# Altium PCB AMPURR.PcbDoc (part 3 of 6)
Units mm, origin at the board's own origin, x right, y up, seen from the top; angles counter-clockwise.
Board outline 100 x 100 mm, 4 copper layers (Top Layer, GND, VDD, Bottom Layer), stack 1.586 mm thick; 522 components, 281 nets, 1527 pads, 2431 vias.
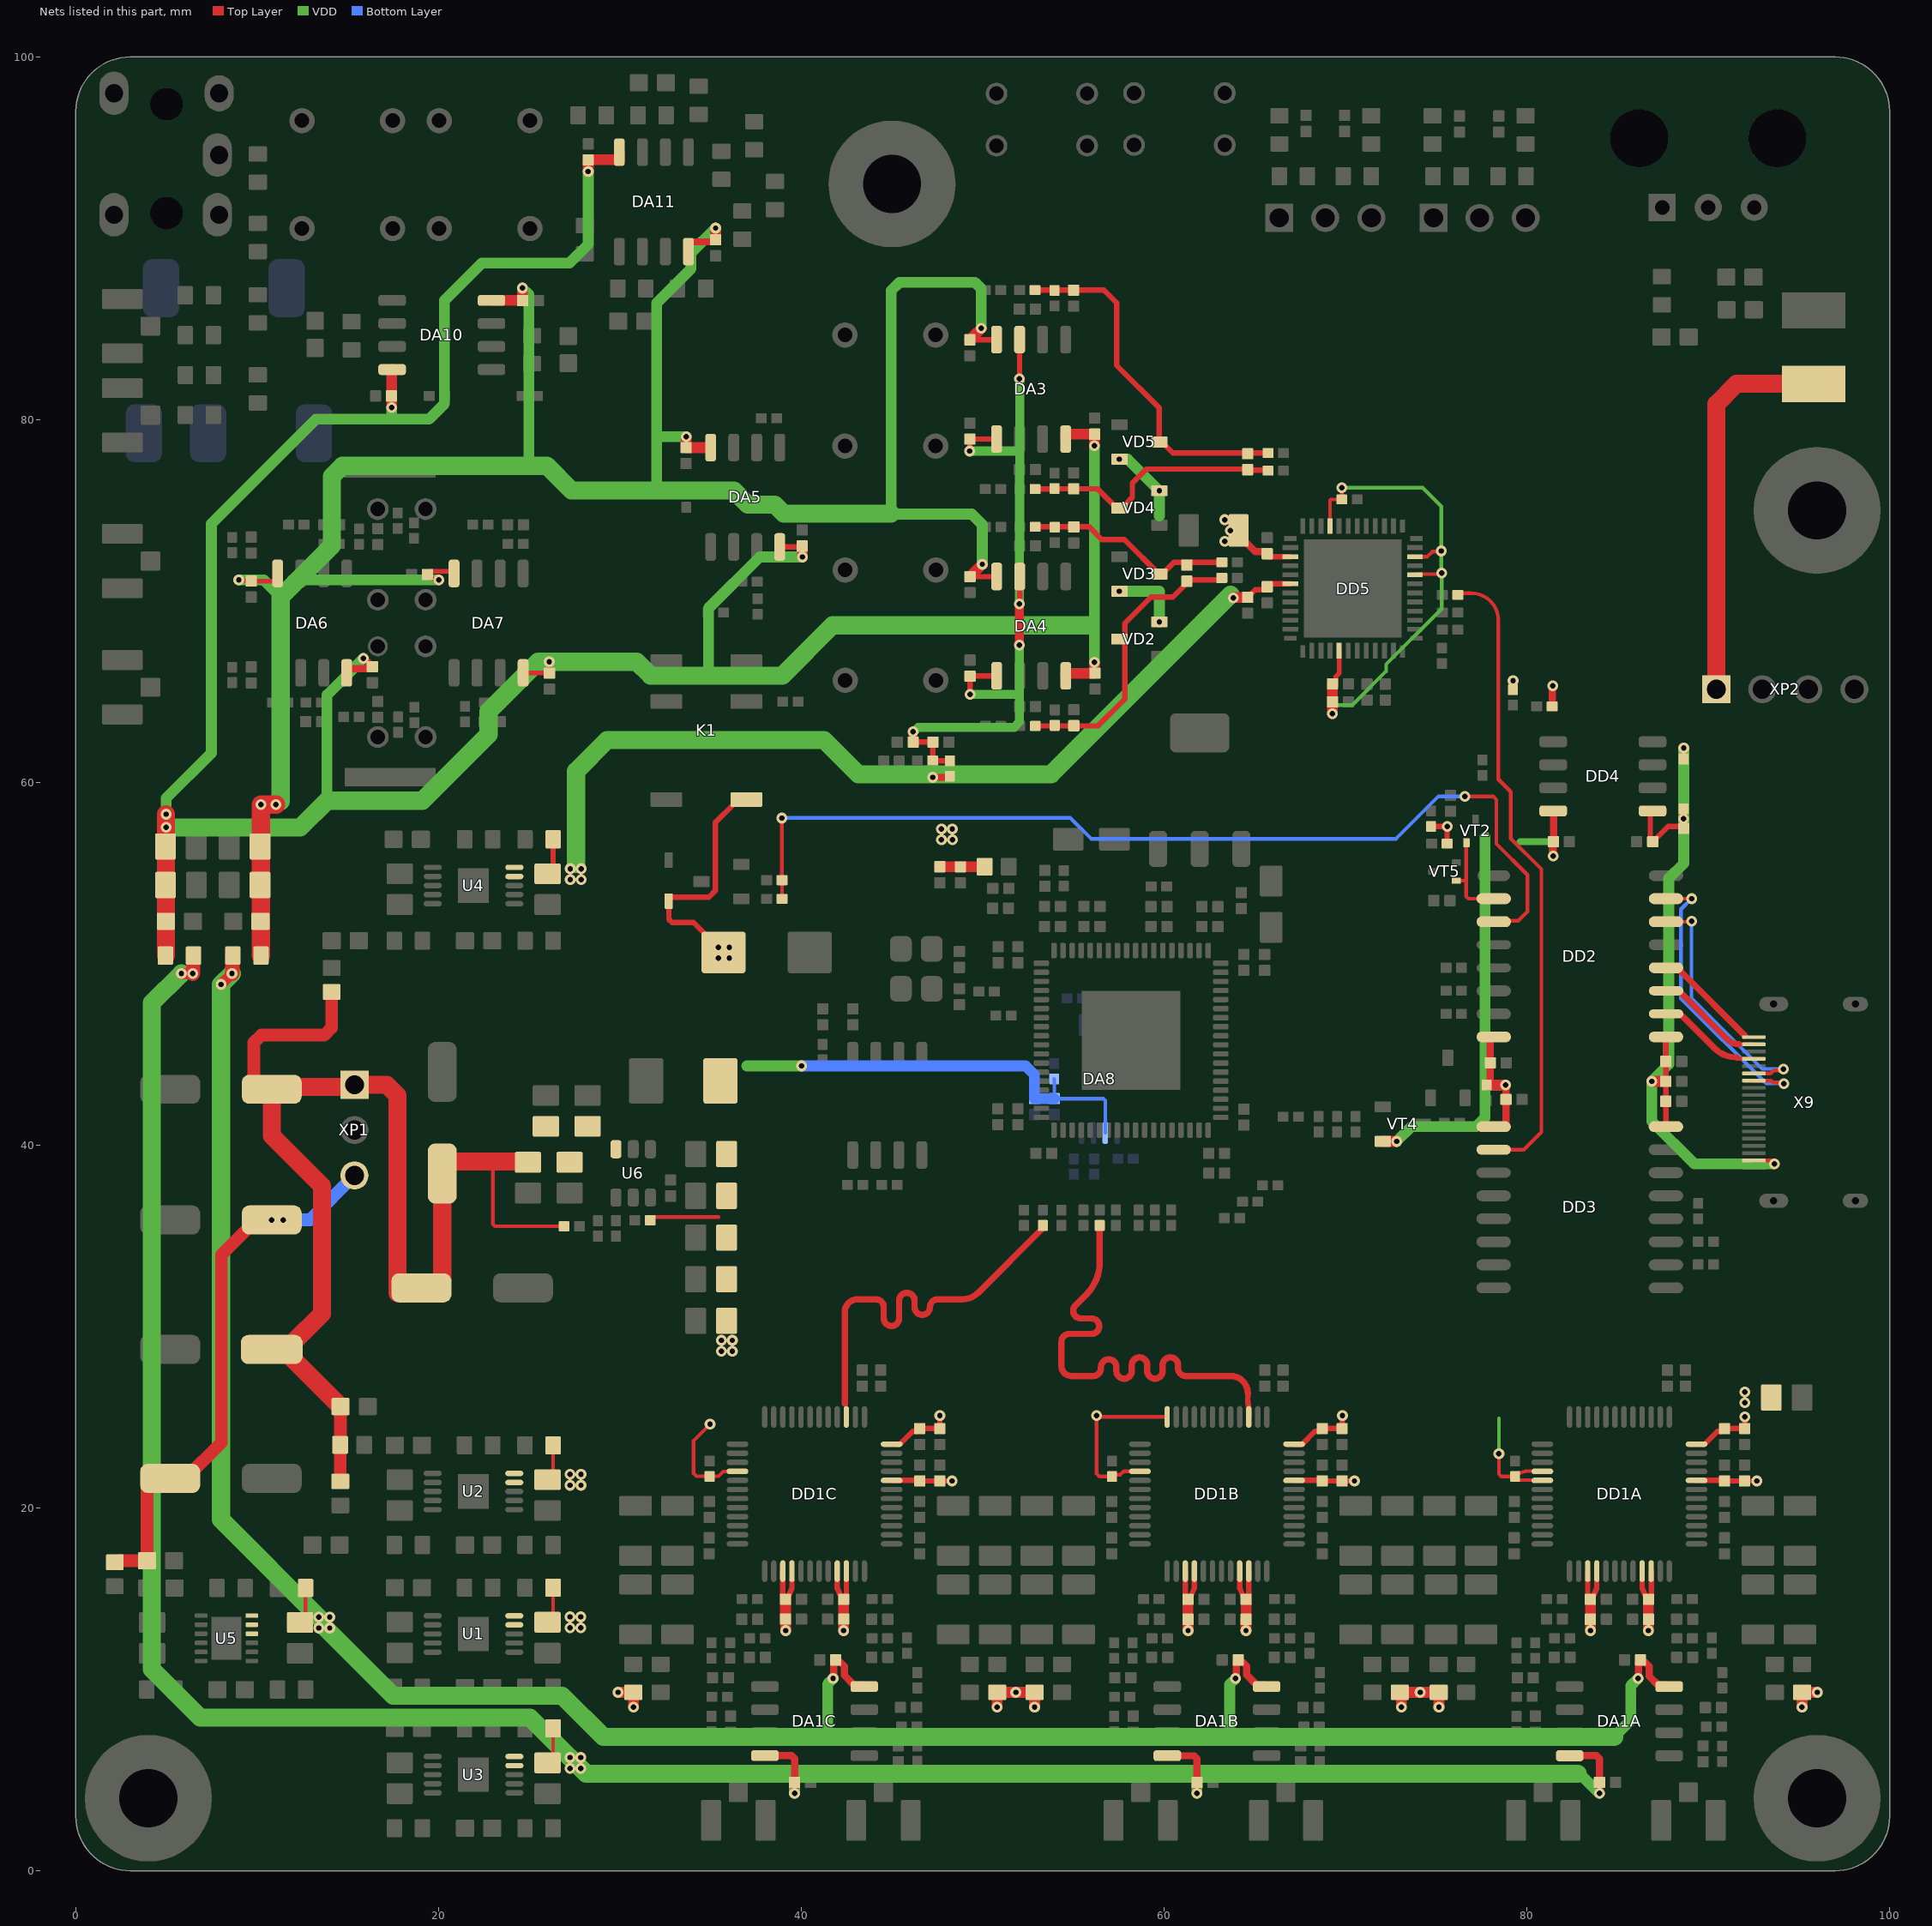
[diagram p4: the nets of this part, all layers, seen from the top]

## Via types
v1: diameter 0.6, hole 0.3, Top Layer to Bottom Layer, tented both sides, 2431 vias

## Nets (pads, with @x,y where several pads share a name; then routed paths per layer and width w, separated by ;. In a path a pad name is that pad's centre, name@x,y a point inside that pad or via, vN(x,y) a via of type N, cw(c..) or ccw(c..) an arc to the next point about the centre after c; other vN are vias at no path point) (continued)
+3.3VD: (continued)
  Top Layer w0.3: VD1.CA@32.693,53.462 32.693,52.458 32.868,52.283 34.058,52.283 34.647,51.694 34.647,51.63 35.363,50.914 v1(35.427,50.914) ; VD1.CA@32.693,53.598 32.768,53.673 34.897,53.673 35.267,54.043 35.267,57.801 36.249,58.783 36.249,58.814 36.499,59.064 K1.1@36.974,59.064 ; C75.1@35.273,50.331 C75.1@35.273,50.882 ; C75.1@35.389,50.876 35.633,50.632 C75.1@35.708,50.632 ; DD1C.48@45.321,23.517 45.427,23.517 46.132,24.221 46.37,24.221 C10C.1@46.53,24.381 C9C.1@47.637,24.381 ; v1(47.636,25.089) 47.636,24.541 C9C.1@47.649,24.521 ; DD1B.48@67.168,23.519 67.618,23.519 67.618,23.521 68.318,24.221 68.558,24.221 C10B.1@68.718,24.381 C9B.1@69.818,24.381 69.818,24.541 v1(69.832,25.089) ; R25.2@74.724,57.575 74.727,57.572 75.604,57.572 v1(75.607,57.57) 75.605,57.568 75.605,56.627 R129.2@75.603,56.625 ; DD1A.48@89.697,23.517 89.797,23.517 90.502,24.221 90.746,24.221 C10A.1@90.906,24.381 C9A.1@92.006,24.382 ; C9A.1@92.006,24.382 92.018,24.382 v1(92.018,25.026) v1@92.018,25.066
  Top Layer w0.4: R128.2@77.786,43.32 77.786,43.345 77.986,43.546 C39.2@77.986,44.545 77.986,45.88 78.079,45.972 DD2.16@78.175,45.972 ; DD3.1@78.171,41.024 78.761,41.024 78.853,41.117 C41.2@78.853,42.525 78.844,42.534 78.844,43.312 v1(78.834,43.321) ; R106.1@79.235,65.114 79.239,65.118 79.239,65.617 v1(79.244,65.621) ; R105.1@81.394,64.2 81.409,64.215 81.409,65.314 v1(81.424,65.329) ; v1(81.45,55.945) 81.458,55.953 81.458,56.73 C44.2@81.466,56.737 81.466,58.421 DD4.8@81.455,58.432
  Top Layer w0.6: v1@36.194,29.239 v1(36.194,29.247) ; C146.2@47.64,55.354 48.768,55.354 48.77,55.352 49.969,55.352 FB4.1@49.984,55.336 ; v1(69.284,63.8) 69.284,65.436 C116.2@69.287,65.439 ; VT4.2@72.057,40.217 v1(72.82,40.216) ; R128.2@77.908,43.32 78.833,43.32 v1(78.834,43.321)
  Top Layer w1: XP2.1@90.441,65.14 90.441,80.859 91.56,81.978 L1.2@95.812,81.978
  VDD w0.2: 69.38,64.267 70.375,64.267 72.245,66.138 72.245,66.516 75.304,69.575 v1(75.304,71.548) 75.285,71.548 v1(75.285,72.762) 75.285,75.227 74.258,76.254 v1(69.805,76.254) ; v1(78.459,22.988) 78.458,22.989 78.458,24.941
  VDD w0.4: 79.626,56.738 81.201,56.738 81.436,56.503 v1@81.436,55.96
  VDD w0.6: 36.998,44.372 v1(40.016,44.372) ; v1(72.82,40.216) 73.632,41.028 77.206,41.028 77.688,41.51 77.688,57.007 ; 77.795,43.32 78.833,43.32 v1(78.834,43.321)
  Bottom Layer w0.2: R99.2@53.941,43.655 53.948,43.648 53.948,42.579 C141.2@53.955,42.57 ; C141.2@53.955,42.57 56.639,42.57 56.756,42.453 DA8.6@56.756,40.682
  Bottom Layer w0.6: v1(40.016,44.372) 52.364,44.372 52.855,43.881 C140.2@52.855,42.57 C141.2@53.955,42.57
  other v1: 92.019,25.798 92.019,26.398 35.594,28.647 36.194,28.647 35.594,29.247 35.427,50.314 36.027,50.314 36.027,50.914 47.727,56.844 48.326,56.844 47.727,57.442 48.325,57.442
+5VA: C17A.1 C17B.1 C17C.1 C18A.1 C18B.1 C18C.1 C19A.2 C19B.2 C19C.2 C20A.2 C20B.2 C20C.2 C49.1 DD1A.27 DD1A.28 DD1A.33 DD1A.34 DD1B.27 DD1B.28 DD1B.33 DD1B.34 DD1C.27 DD1C.28 DD1C.33 DD1C.34 R1A.2 R1B.2 R1C.2 R17A.2 R17B.2 R17C.2 R32.2 U1.9 U1.10 | length 50.4
  Top Layer w0.2: C49.1@26.313,14.01 R32.2@26.313,15.602
  Top Layer w0.3: C49.1@26.005,13.702 ccw(c26.005,14.01) C49.1@26.313,14.01 ; DD1C.27@38.98,16.519 38.98,15.12 C17C.1@39.13,14.969 C17C.1@39.29,15.129 ; C17C.1@39.288,15.125 39.478,15.574 DD1C.28@39.48,16.069 ; DD1C.33@41.98,16.069 41.982,15.574 C19C.2@42.172,15.125 ; C19C.2@42.172,15.129 C19C.2@42.332,14.969 42.48,15.117 DD1C.34@42.48,16.519 ; DD1B.27@61.168,16.515 61.168,15.115 61.318,14.965 C17B.1@61.478,15.125 ; DD1B.27@61.168,16.519 61.168,15.12 C17B.1@61.318,14.969 ; C18B.1@61.318,13.869 C17B.1@61.318,14.969 ; C17B.1@61.476,15.125 61.666,15.574 DD1B.28@61.668,16.069 ; C17B.1@61.478,15.129 C17B.1@61.318,14.969 ; DD1B.33@64.168,16.069 64.17,15.574 64.36,15.125 64.52,14.965 64.671,15.115 DD1B.34@64.671,16.515 ; C20B.2@64.52,13.869 C19B.2@64.52,14.969 ; C19B.2@64.668,14.969 DD1B.34@64.668,16.519 ; DD1A.27@83.356,16.515 83.356,15.116 C17A.1@83.506,14.965 C17A.1@83.666,15.125 ; DD1A.27@83.356,16.519 83.356,15.12 C17A.1@83.506,14.969 ; C18A.1@83.506,13.869 C17A.1@83.506,14.969 ; C17A.1@83.664,15.125 83.854,15.574 DD1A.28@83.856,16.069 ; C17A.1@83.666,15.129 C17A.1@83.506,14.969 ; DD1A.33@86.356,16.519 86.356,16.069 86.358,15.574 86.548,15.125 C19A.2@86.708,14.965 ; C19A.2@86.856,14.969 DD1A.34@86.856,16.519 ; C19A.2@86.858,15.116 DD1A.34@86.858,16.515
  Top Layer w0.6: v1(29.895,9.833) R17C.2@30.735,9.833 30.745,9.823 v1(30.745,9.02) ; C17C.1@39.13,14.969 C18C.1@39.13,13.869 39.135,13.864 v1(39.135,13.241) ; v1(42.327,13.241) 42.327,13.864 C20C.2@42.332,13.869 C19C.2@42.332,14.969 ; v1(50.796,9.02) 50.796,9.823 R1C.2@50.806,9.833 52.85,9.833 52.864,9.819 v1(52.864,9.016) ; C17B.1@61.318,14.965 C18B.1@61.318,13.865 61.323,13.86 v1(61.323,13.236) ; v1(64.515,13.236) 64.515,13.86 C20B.2@64.52,13.865 C19B.2@64.52,14.965 ; v1(73.088,9.02) 73.088,9.823 73.098,9.833 R17A.2@75.142,9.833 75.156,9.819 v1(75.156,9.016) ; C17A.1@83.506,14.965 C18A.1@83.506,13.865 83.511,13.86 v1(83.511,13.237) ; v1(86.703,13.237) 86.703,13.86 C20A.2@86.708,13.865 C19A.2@86.708,14.965 ; v1(95.172,9.02) 95.172,9.823 R1A.2@95.182,9.833 v1(96.022,9.833)
  other v1: 51.825,9.833 74.117,9.833 27.239,13.399 27.839,13.399 27.239,13.999 27.839,13.999
+5VAK: C60.1 C104.1 C105.2 C109.2 C110.2 DD5.3 DD5.6 R41.2 R59.1 U4.9 U4.10 VD2.2 VD3.2 VD4.2 VD5.2 | length 64.2
  Top Layer w0.3: C60.1@26.007,54.967 26.315,55.275 R41.2@26.315,56.867 ; C109.2@64.764,70.368 65.028,70.632 65.523,70.632 C110.2@65.683,70.792 ; C104.1@65.667,72.45 66.439,72.45 DD5.3@66.963,72.45 ; C110.2@65.915,70.951 DD5.6@66.963,70.951
  Top Layer w0.4: v1(47.24,60.283) 48.188,60.283 R59.1@48.188,60.344 ; C105.2@64.19,73.566 65.033,72.724 65.672,72.724 65.733,72.663 C104.1@65.763,72.633
  Top Layer w0.6: v1(63.812,70.178) 63.833,70.199 64.595,70.199 C109.2@64.605,70.209
  VDD w0.6: v1(57.537,70.542) 59.737,70.542 v1(59.737,68.858) ; v1(57.537,77.822) 57.993,77.822 v1@59.735,76.08 ; 59.737,74.694 v1(59.737,76.082)
  VDD w1: 27.577,55.522 27.577,60.623 29.295,62.342 41.253,62.342 43.139,60.456 53.768,60.456 v1@63.66,70.349
  other v1: 27.255,54.644 27.855,54.644 27.255,55.244 27.855,55.244 63.346,73.303 63.654,73.895 63.346,74.487
+12VOP: C31A.2 C31B.2 C31C.2 C59.1 DA1A.8 DA1B.8 DA1C.8 R40.1 R57.1 U3.9 U3.10 | length 138.4
  Top Layer w0.2: C59.1@26.007,5.945 ccw(c26.007,6.253) 26.315,6.253 R40.1@26.315,7.845
  Top Layer w0.4: DA1C.8@38.063,6.342 39.468,6.342 39.63,6.18 39.63,4.872 39.626,4.868 v1(39.626,4.274) ; DA1B.8@60.251,6.338 61.656,6.338 61.818,6.176 C31B.2@61.818,4.868 61.813,4.863 v1(61.813,4.269) ; DA1A.8@82.439,6.338 83.844,6.338 84.006,6.176 C31A.2@84.006,4.868 ; v1(84.001,4.269) 84.001,4.863 C31A.2@84.006,4.868
  Top Layer w0.6: v1@5.819,49.458 6.437,49.458 v1(6.444,49.465)
  Top Layer w0.8: v1(6.444,49.465) 6.469,49.49 6.469,50.444 R57.1@6.484,50.459
  VDD w0.6: v1@5.825,49.465 v1(6.444,49.465) ; v1(39.626,4.274) 39.626,5.151 ; v1(61.813,4.269) 61.813,5.151 ; 82.868,5.403 v1(84.001,4.269)
  VDD w1: v1@5.812,49.465 4.19,47.843 4.19,11.11 5.443,9.857 6.858,8.442 25.042,8.442 v1(27.243,6.241) 27.543,5.941 v1(27.843,5.641) 28.134,5.35 56.906,5.35 56.911,5.346 82.81,5.346
  other v1: 27.243,5.641 27.843,6.241 5.819,49.465
+12VOPF: C84.1 C85.1 C86.2 C87.2 C88.2 C89.1 C164.1 C165.1 C170.1 C171.1 DA3.8 DA4.8 DA5.8 DA6.8 DA7.8 DA10.8 DA11.8 R57.2 | length 164
  Top Layer w0.25: DA7.8@24.662,66.046 24.668,66.04 26.111,66.04 26.107,66.044 v1@26.107,66.648
  Top Layer w0.3: DA5.8@38.809,72.987 38.82,72.997 C87.2@40.046,72.997
  Top Layer w0.4: DA6.8@14.937,66.046 15.037,66.267 16.241,66.267 C165.1@16.351,66.377 15.887,66.841 v1(15.859,66.841)
  Top Layer w0.6: v1(17.408,80.666) 17.408,82.768 DA10.8@17.435,82.768 ; v1(28.247,93.684) 28.247,94.328 C170.1@28.244,94.331 29.964,94.331 DA11.8@29.964,94.751 ; v1(40.055,72.435) C87.2@40.055,73.03 ; DA3.8@54.573,78.938 54.573,79.206 C88.2@56.134,79.206 ; DA4.8@54.581,65.878 54.581,66.021 C86.2@56.183,66.021 ; C86.2@56.164,66.051 v1@56.164,66.623 ; v1(56.163,78.563) C88.2@56.163,79.194
  Top Layer w1: C85.1@4.939,56.472 C85.1@4.971,56.472 ; R57.2@4.971,50.459 C85.1@4.971,56.472 ; v1(4.971,58.247) C85.1@4.971,56.472
  VDD w0.6: v1(4.971,57.523) 4.971,59.124 7.467,61.621 7.467,74.266 13.237,80.035 17.338,80.035 ; 13.848,58.994 13.848,64.83 v1(15.859,66.841) ; v1(17.408,80.666) 17.408,80.106 17.338,80.035 ; v1(28.247,93.684) 28.247,89.676 27.213,88.642 22.387,88.642 20.317,86.572 20.317,80.879 19.474,80.035 17.338,80.035 ; 34.884,65.944 34.884,69.611 37.708,72.435 v1(40.055,72.435) ; v1@56.163,66.638 v1(56.163,78.563)
  VDD w1: v1(4.971,57.523) 4.976,57.519 12.373,57.519 13.848,58.994 ; 14.046,58.994 19.094,58.994 22.753,62.652 22.753,63.927 25.479,66.653 v1(26.102,66.653) 30.927,66.653 31.693,65.887 38.948,65.887 41.728,68.667 55.953,68.667
  other v1: 56.163,66.624
-12V0: C65.1 C66.2 C191.2 FB3.1 XP1.3 | length 30.5
  Top Layer w0.7: FB3.1@2.145,16.92 2.2,16.92 2.376,17.096 C65.1@3.92,17.096 3.92,21.175 4.377,21.632 C191.2@5.2,21.632 6.05,21.632 8.025,23.607 8.025,33.955 9.95,35.88 v1(10.8,35.88) C66.2@11.219,36.299
  Bottom Layer w0.7: v1(11.43,35.88) 12.908,35.88 XP1.3@15.363,38.335
-12VOP: C32A.1 C32B.1 C32C.1 C69.2 DA1A.4 DA1B.4 DA1C.4 R51.2 R64.2 U5.10 U5.11 U5.12 | length 136.8
  Top Layer w0.2: C69.2@12.358,13.689 ccw(c12.358,13.997) 12.666,13.997 R51.2@12.666,15.59
  Top Layer w0.4: v1@41.753,10.693 41.791,10.731 41.791,11.537 C32C.1@41.876,11.622 ; C32C.1@41.895,11.622 42.005,11.512 42.132,11.512 42.367,11.278 42.367,10.775 42.889,10.252 43.37,10.252 DA1C.4@43.47,10.152 ; v1@63.94,10.693 63.94,10.747 63.979,10.787 63.979,11.518 C32B.1@64.083,11.622 ; C32B.1@64.083,11.618 64.189,11.512 64.32,11.512 64.554,11.278 64.554,10.793 65.096,10.252 65.553,10.252 DA1B.4@65.657,10.148 ; v1@86.128,10.693 86.166,10.731 86.166,11.532 C32A.1@86.252,11.618 ; C32A.1@86.271,11.618 86.377,11.512 86.508,11.512 86.742,11.278 86.742,10.727 87.221,10.248 87.745,10.248 DA1A.4@87.845,10.148
  Top Layer w0.6: v1(8.004,48.862) v1(8.607,49.465)
  Top Layer w0.8: v1(8.607,49.465) 8.635,49.492 8.635,50.44 R64.2@8.653,50.459
  VDD w0.6: 41.452,7.374 41.452,10.299 v1(41.753,10.6) ; 63.62,7.254 63.62,7.374 63.62,10.28 v1(63.94,10.6) ; 84.81,7.374 85.732,8.296 85.732,10.204 v1(86.128,10.6)
  VDD w1: v1(8.607,49.465) v1(8.004,48.862) 8.004,19.357 v1@13.527,13.834 ; v1@13.611,13.508 13.64,13.508 17.493,9.654 26.812,9.654 29.091,7.374 41.452,7.374 63.62,7.374 84.81,7.374
  other v1: 13.393,13.382 13.993,13.382 13.393,13.982 13.993,13.982
-12VOPF: C91.2 C92.1 C95.2 C96.1 C97.2 C98.1 C166.2 C167.2 C172.2 C173.2 DA3.4 DA4.4 DA5.4 DA6.4 DA7.4 DA10.4 DA11.4 R64.1 | length 142.7
  Top Layer w0.25: v1(8.984,71.163) 9.014,71.132 9.637,71.132 C167.2@9.668,71.102 10.954,71.102 11.127,71.275 DA6.4@11.127,71.526 ; v1@19.991,71.106 19.567,71.284 C166.2@19.382,71.469 19.554,71.641 20.737,71.641 DA7.4@20.852,71.526
  Top Layer w0.3: C96.1@49.293,84.406 50.751,84.406 DA3.4@50.763,84.418 ; C92.1@49.3,71.346 50.758,71.346 DA4.4@50.77,71.358
  Top Layer w0.4: DA11.4@33.774,89.271 33.774,89.709 33.874,89.809 C172.2@35.159,89.809
  Top Layer w0.6: DA10.4@22.915,86.578 C173.2@24.629,86.578 ; v1(24.619,87.261) 24.625,87.255 24.625,86.581 C173.2@24.629,86.578 ; C173.2@24.635,86.571 C173.2@24.629,86.578 ; C98.1@33.646,78.46 34.999,78.46 DA5.4@34.999,78.467 ; C98.1@33.647,78.461 v1(33.647,79.064) ; C172.2@35.272,89.922 v1(35.272,90.567) ; C96.1@49.293,84.408 49.563,84.679 49.563,84.686 v1(49.92,85.043) ; C92.1@49.3,71.346 49.98,72.026 v1(49.98,72.033)
  Top Layer w1: R64.1@10.203,50.459 v1(10.203,58.781) v1(11.033,58.781)
  VDD w0.6: v1(8.984,71.163) 10.365,71.163 11.291,70.237 ; v1(11.033,58.781) 11.279,58.781 11.279,58.967 ; 12.055,71.001 12.217,71.163 v1(20.015,71.163) ; v1(24.619,87.261) 24.975,86.904 24.975,77.458 ; 32.022,76.098 32.022,79.064 ; v1(33.647,79.064) 32.022,79.064 ; v1(35.272,90.567) 33.915,89.209 33.915,88.328 32.022,86.435 32.022,79.064 ; v1(49.92,85.043) 49.92,87.222 49.569,87.573 45.407,87.573 44.947,87.113 44.947,74.801 49.398,74.801 49.98,74.219 v1(49.98,72.033)
  VDD w1: 11.279,58.967 11.291,58.967 11.291,70.237 12.055,71.001 14.111,73.057 14.111,76.872 14.697,77.458 24.975,77.458 25.973,77.458 27.334,76.098 32.022,76.098 36.275,76.098 37.048,75.324 38.53,75.324 39.03,74.824 44.947,74.824
AIN1N: C101.2 C102.1 R65.1 R68.1 R132.2 VD4.3 | length 14.7
  Top Layer w0.3: R65.1@52.891,76.177 53.935,76.177 R68.1@53.966,76.208 ; R68.1@53.981,76.193 C102.1@55.016,76.193 56.325,76.193 57.387,75.132 57.687,75.132 57.837,75.282 57.837,75.307 58.25,75.72 58.25,76.514 59.015,77.279 64.572,77.279 C101.2@64.606,77.245 64.632,77.219 65.704,77.219 R132.2@65.731,77.193
AIN1P: C90.1 C101.1 R55.1 R62.1 R131.2 VD5.3 | length 19.6
  Top Layer w0.3: R55.1@52.887,87.153 56.683,87.153 57.391,86.445 57.391,82.998 59.73,80.659 59.73,78.929 60.49,78.168 R131.2@65.731,78.168
AIN2N: C108.1 C111.1 R70.1 R73.1 R133.2 VD3.3 | length 11.7
  Top Layer w0.3: R70.1@52.894,74.093 55.866,74.093 56.567,73.391 57.81,73.391 VD3.3@59.761,71.441 ; VD3.3@59.737,71.492 59.887,71.492 60.54,72.145 R133.2@63.191,72.145
AIN2P: C108.2 C114.1 R78.1 R82.1 R134.2 VD2.3 | length 16.1
  Top Layer w0.3: R78.1@52.898,63.117 53.973,63.117 55.023,63.117 56.352,63.117 57.837,64.602 57.837,67.908 57.837,68.781 59.28,70.223 60.488,70.223 61.265,71 61.427,71.162 63.075,71.162 R134.2@63.19,71.277
BIAS: C93.2 C94.2 C103.2 C115.2 DA3.3 DA3.5 DA4.3 DA4.5 R59.2 R61.2 | length 42.3
  Top Layer w0.3: C93.2@46.165,62.229 C94.2@47.24,62.229 ; C94.2@47.258,62.229 C94.2@47.24,62.229 ; R59.2@48.188,61.194 47.24,61.194 R61.2@47.24,61.215 C94.2@47.24,62.229 ; v1(49.285,78.273) 49.293,78.273 C103.2@49.293,78.935 50.76,78.935 DA3.5@50.763,78.938 ; v1(49.302,64.864) v1(49.302,64.864) 49.301,65.867 C115.2@49.3,65.868 50.761,65.868 DA4.5@50.771,65.878 ; v1(52.028,82.256) 52.03,82.259 52.03,84.415 DA3.3@52.033,84.418 ; v1@52.041,69.861 DA4.3@52.041,71.358
  Top Layer w0.5: C93.2@46.165,62.229 v1(46.165,62.803) ; v1(52.026,67.575) v1(52.026,69.846)
  VDD w0.5: v1(46.165,62.803) 46.192,62.803 46.434,63.045 51.733,63.045 52.026,63.338 52.026,64.864 ; v1(49.285,78.273) 51.987,78.273 ; v1(49.302,64.864) 52.026,64.864 ; v1(52.026,67.575) 52.026,64.864 ; v1(52.026,69.846) 52.033,75.625 ; 52.034,75.675 52.037,78.273 ; 52.04,78.275 52.04,82.238 v1@52.043,82.241
BLE_BCLK: DD2.2 X9.4 | length 5.3
  Top Layer w0.2: 91.573,44.763 X9.4@92.517,44.763
  Top Layer w0.35: DD2.2@88.146,47.26 cw(c88.146,46.573) 88.632,47.059 90.337,45.354 ccw(c91.566,46.583) 90.353,45.338 ccw(c91.566,46.583) 91.488,44.846 ccw(c91.566,46.583) 91.566,44.845
BLE_LRCLK: DD2.3 X9.2 | length 5.3
  Top Layer w0.2: 91.7,45.563 X9.2@92.517,45.563
  Top Layer w0.35: DD2.3@88.418,48.503 ccw(c88.499,48.503) 88.442,48.446 91.041,45.846 ccw(c91.726,46.53) 91.7,45.563
BLE_SDATA: DD2.4 X9.1 | length 5.3
  Top Layer w0.35: DD2.4@88.167,49.698 cw(c88.167,49.204) 88.516,49.553 X9.1@92.02,46.049
cADAU_RES: DD2.7 X9.7 | length 16.5
  Top Layer w0.2: DD2.7@87.675,53.592 89.082,53.592 v1(89.082,53.594) ; X9.7@92.496,43.561 93.464,43.561 93.564,43.461 94.102,43.461 v1(94.164,43.399)
  Bottom Layer w0.2: v1(89.082,53.594) 88.499,53.011 88.499,48.1 93.2,43.399 v1(94.164,43.399)
cADAU_RESET: DD2.10 VT2.1 VT5.1 | length 5
  Top Layer w0.2: VT5.1@76.119,54.588 76.649,54.588 ; VT2.1@76.649,56.658 76.649,54.588 ; DD2.10@78.175,53.592 76.781,53.592 76.649,53.724 76.649,54.588
cLINE_SW: DD2.6 X9.6 | length 14.1
  Top Layer w0.2: DD2.6@87.675,52.322 89.05,52.322 ccw(c89.05,52.354) v1(89.082,52.354) ; X9.6@92.496,43.961 93.442,43.961 93.603,44.122 94.065,44.122 v1(94.142,44.199)
  Bottom Layer w0.2: v1(89.082,52.354) 89.082,48.095 92.975,44.202 94.138,44.202 v1(94.142,44.199)
cLINE_SWITCH: DD2.11 R20.1 R21.1 | length 53.8
  Top Layer w0.2: v1(38.923,58.039) 38.93,58.032 38.93,54.616 38.934,54.612 38.934,53.592 R20.1@38.937,53.59 ; v1(76.578,59.235) 78.142,59.235 78.32,59.056 78.32,56.624 80.037,54.907 80.037,52.888 79.523,52.374 DD2.11@78.725,52.374
  Bottom Layer w0.2: v1(38.923,58.039) 38.936,58.052 54.824,58.052 55.98,56.895 72.792,56.895 75.132,59.235 v1(76.578,59.235)
cOVF: DD3.2 R72.1 | length 35.3
  Top Layer w0.2: R72.1@76.179,70.434 76.939,70.434 cw(c76.939,68.946) 78.426,68.946 78.426,60.179 79.116,59.49 79.116,56.903 80.797,55.222 80.797,40.721 79.83,39.754 DD3.2@78.171,39.754
DAC_BCK_0: DD1C.3 R95.1 | length 22.6
  Top Layer w0.2: 42.399,25.753 42.461,25.691 42.461,25.038 DD1C.3@42.48,25.019
  Top Layer w0.35: 42.399,25.753 42.399,30.812 cw(c43.089,30.812) 43.089,31.502 43.091,31.502 44.116,31.502 cw(c44.116,31.077) 44.541,31.077 44.541,30.461 ccw(c44.966,30.461) 44.966,30.036 ccw(c44.966,30.461) 45.391,30.461 45.391,31.439 cw(c45.816,31.439) 45.816,31.864 cw(c45.816,31.439) 46.241,31.439 46.241,31.077 ccw(c46.666,31.077) 46.666,30.652 ccw(c46.666,31.077) 47.091,31.077 cw(c47.516,31.077) 47.516,31.502 48.152,31.502 48.875,31.502 ccw(c48.875,32.733) 49.746,31.862 R95.1@53.334,35.451
DAC_BCK_1: DD1B.3 R92.1 | length 28
  Top Layer w0.3: 64.615,26.133 64.615,26.324 ; 64.617,26.328 cw(c64.317,26.328) 64.617,26.324 64.615,26.139 64.612,25.942 ccw(c65.242,25.934) 64.617,25.851 64.668,25.469 DD1B.3@64.668,25.019
  Top Layer w0.35: R92.1@56.451,35.576 56.451,33.562 cw(c53.911,33.562) 55.903,31.986 cw(c53.911,33.562) 55.831,31.899 cw(c53.911,33.562) 55.707,31.766 55.115,31.173 ccw(c55.415,30.873) 55.415,30.448 55.999,30.448 cw(c55.999,30.023) 56.424,30.023 cw(c55.999,30.023) 55.999,29.598 54.768,29.598 ccw(c54.768,29.173) 54.343,29.173 54.343,28.148 54.343,27.816 ccw(c54.881,27.816) 54.881,27.279 54.939,27.279 56.095,27.279 ccw(c56.095,27.704) 56.52,27.704 56.52,27.772 cw(c56.945,27.772) 56.945,28.197 cw(c56.945,27.772) 57.37,27.772 57.37,27.556 ccw(c57.795,27.556) 57.795,27.131 ccw(c57.795,27.556) 58.22,27.556 58.22,27.879 cw(c58.645,27.879) 58.645,28.304 cw(c58.645,27.879) 59.07,27.879 59.07,27.556 ccw(c59.495,27.556) 59.495,27.131 ccw(c59.495,27.556) 59.92,27.556 59.92,27.879 cw(c60.345,27.879) 60.345,28.304 cw(c60.345,27.879) 60.77,27.879 60.77,27.704 ccw(c61.195,27.704) 61.195,27.279 62.22,27.279 63.663,27.279 cw(c63.663,26.324) 64.617,26.324